# Altium PCB MEZ_IC.PcbDoc
Units mm, origin at the board's own origin, x right, y up, seen from the top; angles counter-clockwise.
Board outline 64 x 59 mm, 2 copper layers (Top Layer, Bottom Layer); 4 components, 27 nets, 76 pads, 15 vias.
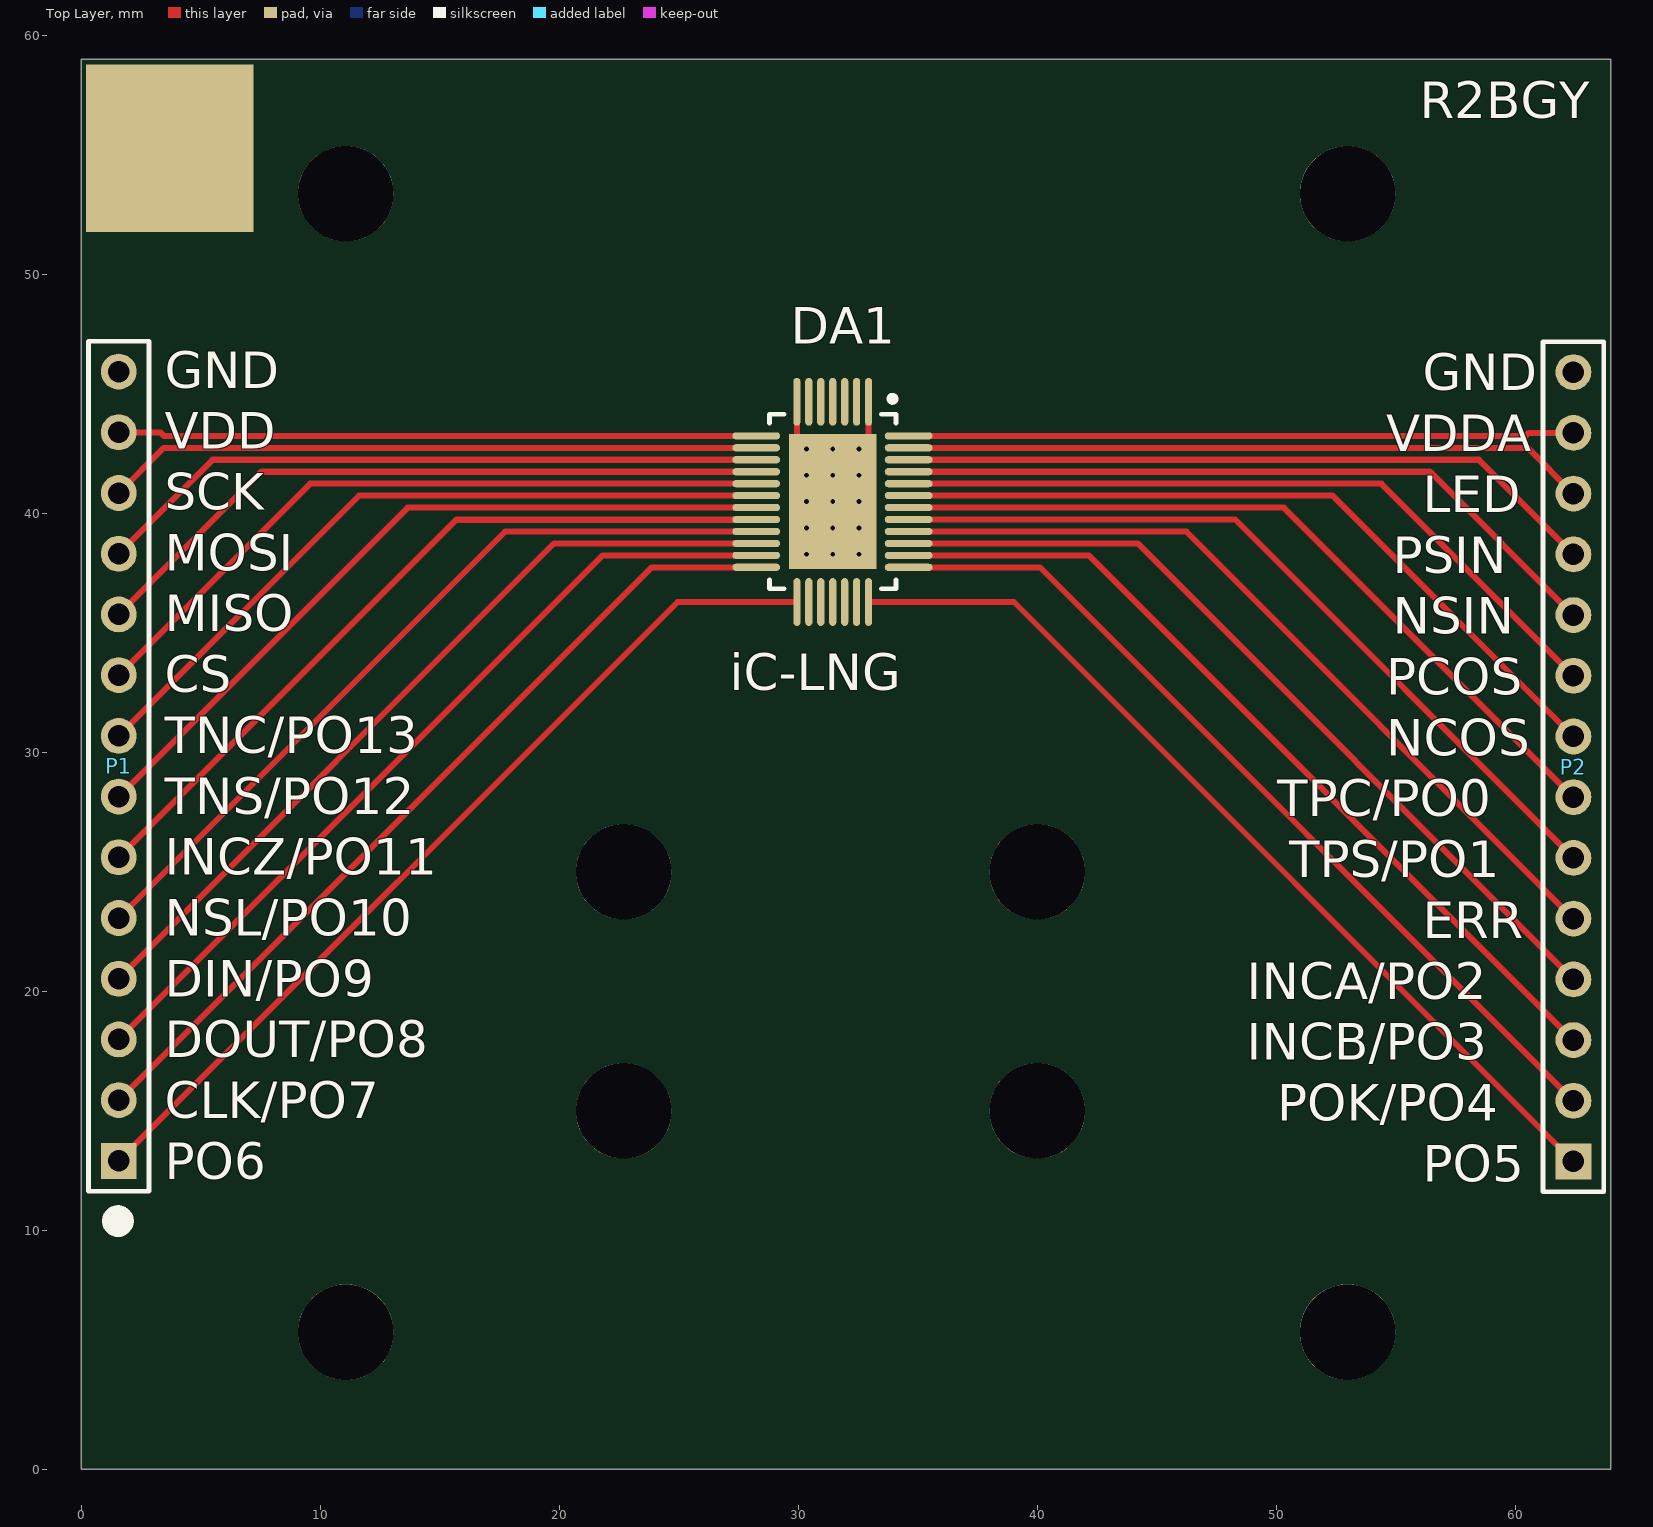
[diagram p0: Top Layer view]
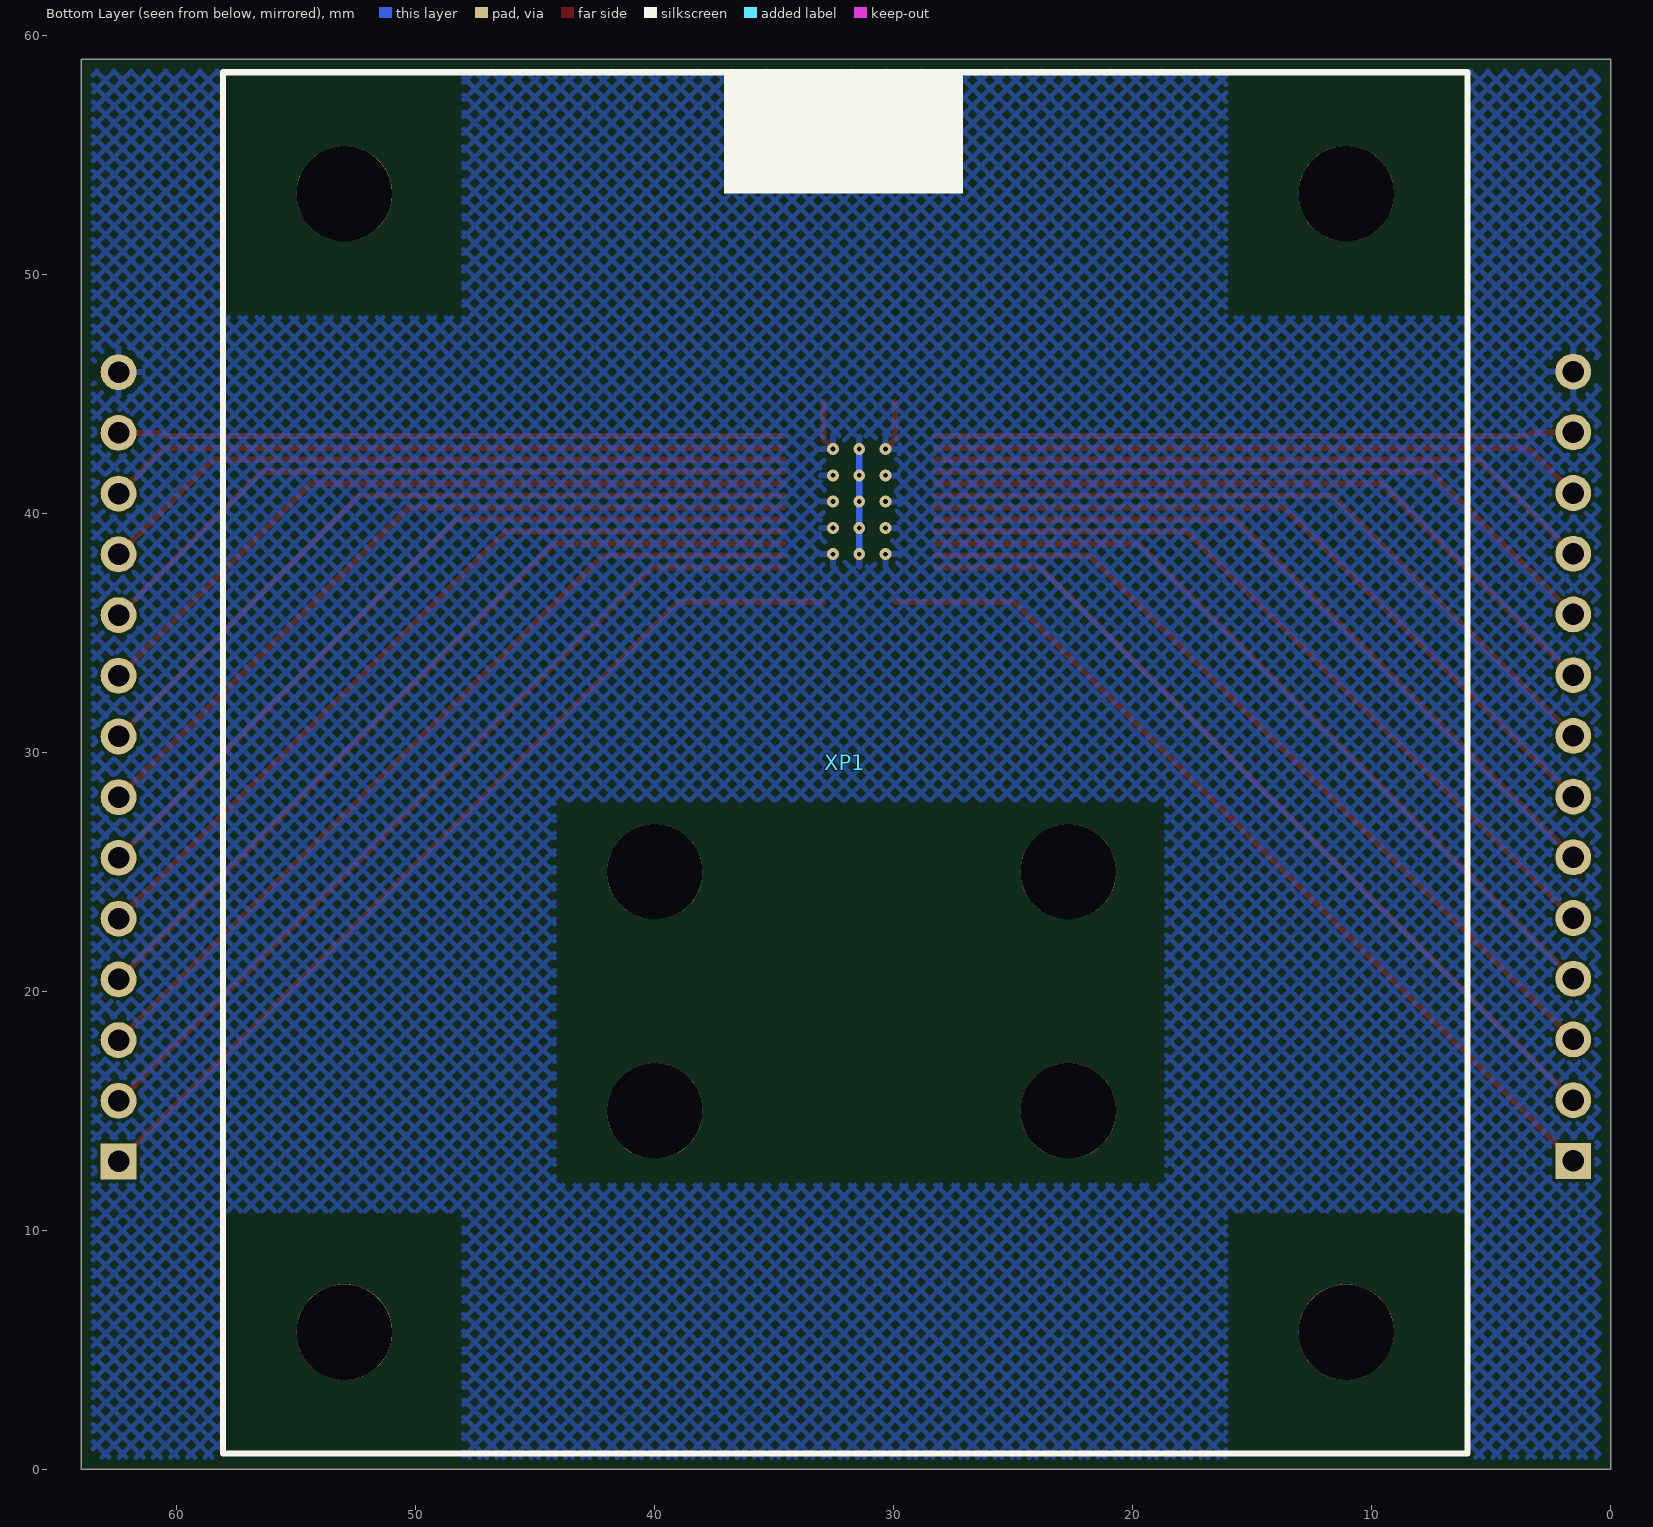
[diagram p1: Bottom Layer view, seen from below]

## Layer stack, top to bottom
Top Solder: solder mask 0.0102, Solder Resist, Dk 3.5
Top Layer: signal copper 0.0356
Dielectric 1: dielectric 0.32, FR-4, Dk 4.8
Bottom Layer: signal copper 0.0356
Bottom Solder: solder mask 0.0102, Solder Resist, Dk 3.5

## Board outline
0,0 0,59 64,59 64,0

## Design rules (kind name [scope] priority, off if disabled: settings)
Clearance [All] p1: gap=0.125 ignorepadtopadclearanceinfootprint=FALSE
HoleSize [All] p1: absolutevalues=TRUE maxlimit=10 minlimit=0.025 maxpercent=80.000 minpercent=20.000
MinimumSolderMaskSliver [All] p1: minsoldermaskwidth=0.1
PolygonConnect [All] p1: connectstyle=Relief reliefconductorwidth=0.254 reliefentries=4 polygonreliefangle="90 Angle" airgapwidth=0.254
RoutingVias [All] p1: holewidth=0.711 width=1.27 viastyle="Through Hole" minholewidth=0.711 minwidth=1.27 maxholewidth=0.711 maxwidth=1.27
SolderMaskExpansion [All] p1: expansion=0.102 istentingtop=FALSE
Width [All] p1: maxlimit=0.254 minlimit=0.254 preferedwidth=0.254
28 further rules are at their usual default settings.

## Components (designator, comment, footprint, x,y, rotation, side; value= is the part's Value field where it differs from the comment)
DA1 "iC-LNG" "iC-LNG oQFN" 31.445,40.488 r270 top
P1 "Header 14" HDR1X14 1.575,12.907 r90 top
P2 "Header 14" HDR1X14 62.433,12.882 r90 top
XP1 "Грелка" Грелка 52.984,5.744 r270 bottom

## Footprints (in the part's own frame and the unit in brackets; to place one, negate y for a bottom-side part, rotate by r counter-clockwise, add the part's x,y. Pads: shape width x height; smd on the part's side, far side on the other; paste and mask are expansions set on the pad)
HDR1X14 [mm] "Connector; Header; 14 Position"
  rect 1.5x1.5 hole 0.9: 1(0,0)
  round 1.5 hole 0.9: 2(2.54,0) 3(5.08,0) 4(7.62,0) 5(10.16,0) 6(12.7,0) 7(15.24,0) 8(17.78,0) 9(20.32,0) 10(22.86,0) 11(25.4,0) 12(27.94,0) 13(30.48,0) 14(33.02,0)
  silkscreen extent -1.27,-1.27 34.29,1.27
"iC-LNG oQFN" [mm] "QFN, 38-Leads, Body 7,00x5,00mm, Pitch 0,50mm, Thermal Pad 5,65x3,65mm, IPC Medium Density"
  oval 2x0.3 smd: 1(-4.175,1.5) 2(-4.175,1) 3(-4.175,0.5) 4(-4.175,0) 5(-4.175,-0.5) 6(-4.175,-1) 7(-4.175,-1.5) 20(4.2,-1.5) 21(4.2,-1) 22(4.2,-0.5) 23(4.2,0) 24(4.2,0.5) 25(4.2,1) 26(4.2,1.5)
  oval 0.3x2 smd: 8(-2.75,-3.2) 9(-2.25,-3.2) 10(-1.75,-3.2) 11(-1.25,-3.2) 12(-0.75,-3.2) 13(-0.25,-3.2) 14(0.25,-3.2) 15(0.75,-3.2) 16(1.25,-3.2) 17(1.75,-3.2) 18(2.25,-3.2) 19(2.75,-3.2) 27(2.75,3.175) 28(2.25,3.175) 29(1.75,3.175) 30(1.25,3.175) 31(0.75,3.175) 32(0.25,3.175) 33(-0.25,3.175) 34(-0.75,3.175) 35(-1.25,3.175) 36(-1.75,3.175) 37(-2.25,3.175) 38(-2.75,3.175)
  rect 5.65x3.65 smd: 39(0,0)
  silkscreen extent -4.42,-2.65 3.65,2.65, body extent -3.5,-2.5 3.5,2.5, height 1
Грелка [mm]
  round 4 hole 4 unplated: 0(-47.625,0) 0(-47.625,41.91) 0(0,0) 0(0,41.91)
  silkscreen extent -52.7,-5.08 5.08,46.99

## Part data
DA1: "Оптический энкодер"
P1 P2: "Header, 14-Pin", LatestRevisionDate=17-Jul-2002, LatestRevisionNote="Re-released for DXP Platform.", Publisher="Altium Limited"

## Free pads (board coordinates)
  round 4 hole 4 unplated: 0(22.7,15) 0(22.7,25) 0(40,15) 0(40,25)
  rect 7x7 smd: 2(3.708,55.27)

## Via types
v1: diameter 0.5, hole 0.2, Top Layer to Bottom Layer, 15 vias

## Nets (pads, with @x,y where several pads share a name; then routed paths per layer and width w, separated by ;. In a path a pad name is that pad's centre, name@x,y a point inside that pad or via, vN(x,y) a via of type N, cw(c..) or ccw(c..) an arc to the next point about the centre after c; other vN are vias at no path point)
CLK/PO7: DA1.19 P1.2 | length 35.9
  Top Layer w0.254: P1.2 23.865,37.738 DA1.19
CS: DA1.12 P1.9 | length 30
  Top Layer w0.254: P1.9 9.585,41.238 DA1.12
DIN/PO9: DA1.17 P1.4 | length 34.2
  Top Layer w0.254: P1.4 19.785,38.738 DA1.17
DOUT/PO8: DA1.18 P1.3 | length 35.1
  Top Layer w0.254: P1.3 21.825,38.238 DA1.18
ERR: DA1.30 P2.5 | length 34.5
  Top Layer w0.254: DA1.30 46.237,39.238 P2.5
GND: DA1.1 DA1.7 DA1.39 P1.14 P2.14 | length 8.7
  Top Layer w0.254: DA1.7 29.945,43.088 v1(30.345,42.688) ; v1(32.545,42.688) 32.945,43.088 DA1.1
  Bottom Layer w0.254: v1(31.445,38.288) v1(31.445,39.388) v1(31.445,40.488) v1(31.445,41.588) v1(31.445,42.688)
  other v1: 30.345,38.288 32.545,38.288 30.345,39.388 32.545,39.388 30.345,40.488 32.545,40.488 30.345,41.588 32.545,41.588
INCA/PO2: DA1.29 P2.4 | length 35.4
  Top Layer w0.254: DA1.29 44.197,38.738 P2.4
INCB/PO3: DA1.28 P2.3 | length 36.2
  Top Layer w0.254: DA1.28 42.157,38.238 P2.3
INCZ/PO11: DA1.15 P1.6 | length 32.5
  Top Layer w0.254: P1.6 15.697,39.729 28.236,39.729 DA1.15
LED: DA1.37 P2.12 | length 28.6
  Top Layer w0.254: DA1.37 60.517,42.738 P2.12
MISO: DA1.11 P1.10 | length 29.1
  Top Layer w0.254: P1.10 7.545,41.738 DA1.11
MOSI: DA1.10 P1.11 | length 28.3
  Top Layer w0.254: P1.11 5.505,42.238 DA1.10
NCOS: DA1.33 P2.8 | length 32
  Top Layer w0.254: DA1.33 52.357,40.738 P2.8
NSIN: DA1.35 P2.10 | length 30.3
  Top Layer w0.254: DA1.35 56.437,41.738 P2.10
NSL/PO10: DA1.16 P1.5 | length 33.4
  Top Layer w0.254: P1.5 17.745,39.238 DA1.16
PCOS: DA1.34 P2.9 | length 31.1
  Top Layer w0.254: DA1.34 54.397,41.238 P2.9
PO5: DA1.26 P2.1 | length 39.2
  Top Layer w0.254: DA1.26 39.027,36.288 P2.1
PO6: DA1.20 P1.1 | length 38.1
  Top Layer w0.254: P1.1 24.955,36.288 DA1.20
POK/PO4: DA1.27 P2.2 | length 37.1
  Top Layer w0.254: DA1.27 40.117,37.738 P2.2
PSIN: DA1.36 P2.11 | length 29.5
  Top Layer w0.254: DA1.36 58.477,42.238 P2.11
SCK: DA1.9 P1.12 | length 27.5
  Top Layer w0.254: P1.12 3.465,42.738 DA1.9
TNC/PO13: DA1.13 P1.8 | length 30.8
  Top Layer w0.254: P1.8 11.625,40.738 DA1.13
TNS/PO12: DA1.14 P1.7 | length 31.7
  Top Layer w0.254: P1.7 13.665,40.238 DA1.14
TPC/PO0: DA1.32 P2.7 | length 32.8
  Top Layer w0.254: DA1.32 50.317,40.238 P2.7
TPS/PO1: DA1.31 P2.6 | length 33.7
  Top Layer w0.254: DA1.31 48.277,39.738 P2.6
VDD: DA1.8 P1.13 | length 26.7
  Top Layer w0.254: P1.13 3.313,43.387 3.462,43.238 DA1.8
VDDA: DA1.38 P2.13 | length 27.9
  Top Layer w0.254: DA1.38 60.438,43.238 60.562,43.362 P2.13
pads on no net: DA1.2 DA1.3 DA1.4 DA1.5 DA1.6 DA1.21 DA1.22 DA1.23 DA1.24 DA1.25 XP1.0

## Polygon pours and split planes (outlines as drawn)
GND on Bottom Layer "Top Overlay-No Net" (hatched 45Degree grid 0.508 track 0.203, remove dead copper, pour order 0): 0.5,0.5 63.5,0.5 63.5,58.5 0.5,58.5

## Other copper
Bottom Layer:
  pour cut-out: 44.2,28 44.2,11.9 18.6,11.9 18.6,28
  pour cut-out: 6,58.6 6,48.2 16.1,48.2 16.1,58.6
  pour cut-out: 48,58.6 48,48.2 58.1,48.2 58.1,58.6
  pour cut-out: 48,10.8 48,0.4 58.1,0.4 58.1,10.8
  pour cut-out: 6,10.8 6,0.4 16.1,0.4 16.1,10.8

## Silkscreen, mask and mechanical layers (free items; w line width, h text height)
Top Overlay:
  circle w0.7: c1.541,10.389 r0.313
  text "R2BGY" at 56.008,56.515 h1.52
  text "GND" at 3.506,45.238 h1.52
  text "GND" at 56.135,45.136 h1.52
  text "VDD" at 3.506,42.692 h1.52
  text "VDDA" at 54.61,42.59 h1.52
  text "SCK" at 3.506,40.146 h1.52
  text "LED" at 56.134,40.044 h1.52
  text "MOSI" at 3.506,37.6 h1.52
  text "PSIN" at 54.864,37.498 h1.52
  text "MISO" at 3.506,35.054 h1.52
  text "NSIN" at 54.864,34.953 h1.52
  text "iC-LNG" at 27.129,32.588 h1.52
  text "CS" at 3.506,32.508 h1.52
  text "PCOS" at 54.61,32.407 h1.52
  text "TNC/PO13" at 3.506,29.962 h1.52
  text "NCOS" at 54.61,29.861 h1.52
  text "TNS/PO12" at 3.506,27.417 h1.52
  text "TPC/PO0" at 50.04,27.315 h1.52
  text "INCZ/PO11" at 3.506,24.871 h1.52
  text "TPS/PO1" at 50.547,24.769 h1.52
  text "NSL/PO10" at 3.506,22.325 h1.52
  text "ERR" at 56.134,22.223 h1.52
  text "DIN/PO9" at 3.506,19.779 h1.52
  text "INCA/PO2" at 48.77,19.677 h1.52
  text "DOUT/PO8" at 3.506,17.233 h1.52
  text "INCB/PO3" at 48.77,17.132 h1.52
  text "CLK/PO7" at 3.506,14.687 h1.52
  text "POK/PO4" at 50.04,14.586 h1.52
  text "PO6" at 3.506,12.141 h1.52
  text "PO5" at 56.134,12.04 h1.52
Mechanical 1:
  the board outline again, w0.254